# Altium PCB deserializer.PcbDoc (part 2 of 2)
Units mm, origin at the board's own origin, x right, y up, seen from the top; angles counter-clockwise.
Board outline 30 x 20 mm, 8 copper layers (Top Layer, L2 - GND, L3 - SIG, L4 - GND, L5 - PWR, L6 - SIG, L7 - GND, Bottom Layer), stack 1.6 mm thick; 98 components, 66 nets, 306 pads, 169 vias.
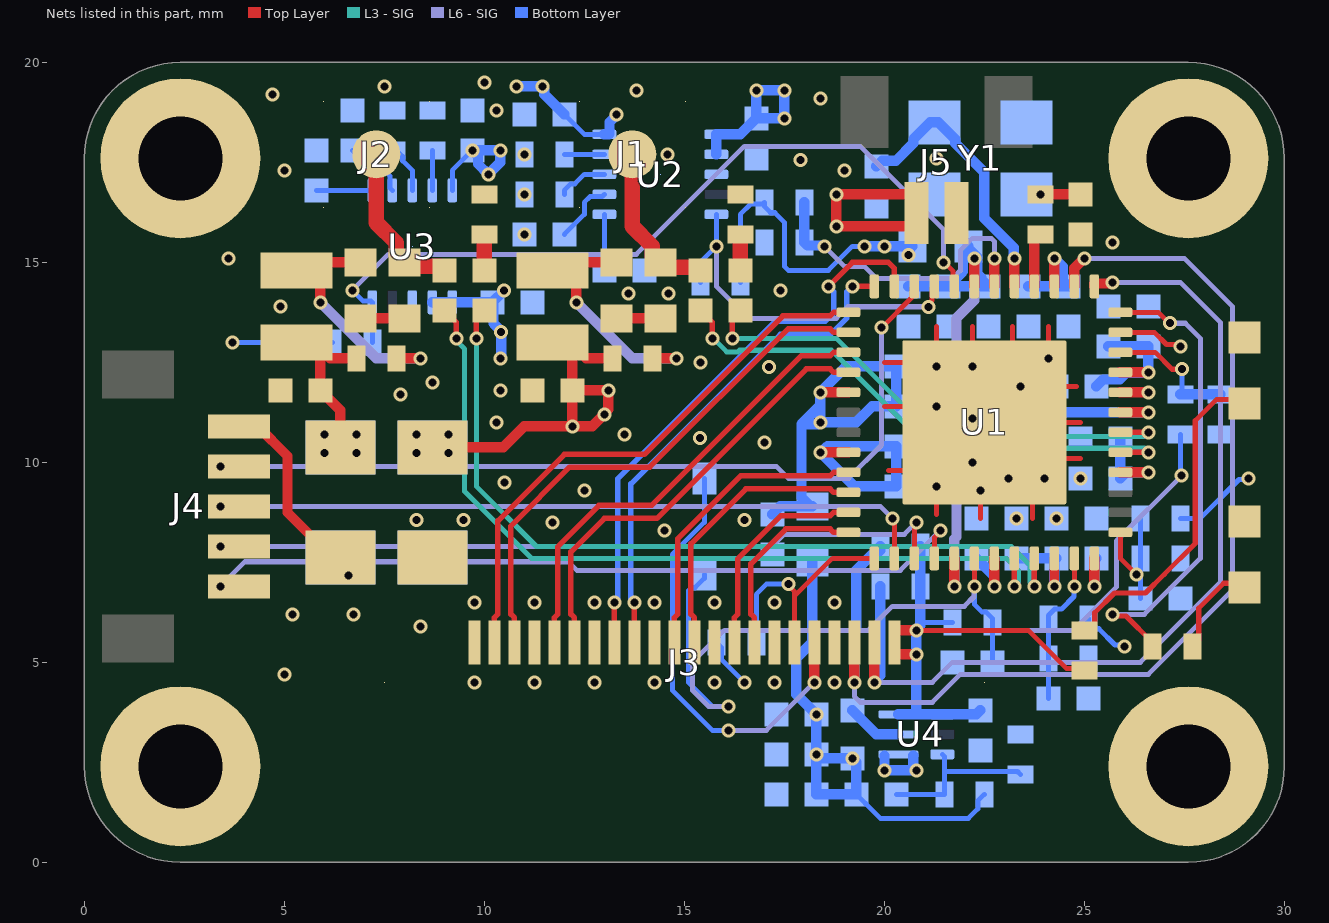
[diagram p8: the nets of this part, all layers, seen from the top]

## Part data (continued)
U2 U3: library part CMP-031-00018-1, "2.7-V to 40-V 152-mΩ 1.8-A eFuse with output power limiting 10-VSON -40 to 125", Case/Package="10-VSON (3x3)", Max Operating Temperature=125°C, Max Supply Voltage=40V, Min Operating Temperature=-40°C, Min Supply Voltage=2.7V, AECQ=No, Mounting Technology=SMT, MPN=TPS16412DRCR, Pins=10
U4: library part CMP-019-00068-1, "IC REG BUCK ADJ 1A 6VSON Buck Switching Regulator IC Positive Adjustable 0.6V 1 Output 1A 6-VFDFN", Case/Package="6-VSON-HR (1.5x1.5)", Frequency=2.2MHz, Max Operating Temperature=125°C, Max Supply Voltage=5.5V, Min Operating Temperature=-40°C, Min Supply Voltage=2.4V, Output Current=1A, Mounting Technology=SMD, Pins=6, RoHS Compliant=Yes
Y1: library part CMP-003-00030-1, "Crystal 25.000 Mhz 12PF SMD", Case/Package=3.2x2.5, Frequency=25MHz, Load Capacitance=12pF, Max Operating Temperature=125°C, Min Operating Temperature=-40°C, AECQ=Yes, ESR=50, Mounting Technology=SMD, Pins=4

## Free pads (board coordinates)
  round 4 hole 2.1: MH1(2.4,17.6) MH2(27.6,17.6) MH3(27.6,2.4) MH4(2.4,2.4)

## Via types
v1: diameter 0.35, hole 0.2, Top Layer to Bottom Layer, tented both sides, 169 vias

## Nets (pads, with @x,y where several pads share a name; then routed paths per layer and width w, separated by ;. In a path a pad name is that pad's centre, name@x,y a point inside that pad or via, vN(x,y) a via of type N, cw(c..) or ccw(c..) an arc to the next point about the centre after c; other vN are vias at no path point)
1V8: C53.2 C62.1 C63.2 C64.2 L6.2 L7.1 R7.2 R9.2 R15.2 | length 16.1
  Bottom Layer w0.127: C53.2@19.3,1.7 19.537,1.463 19.9,1.1 22.1,1.1 22.338,1.339 22.338,1.538 R15.2@22.5,1.7 ; R9.2@25.1,6.1 25.1,6 25.262,5.838 25.362,5.838 25.769,5.431 25.969,5.431 v1(26,5.4) ; R7.2@27.4,8.6 27.9,8.6 28.869,9.569 29.069,9.569 v1(29.1,9.6)
  Bottom Layer w0.254: L7.1@18.2,7.5 18.2,5.5 17.8,5.1 17.8,4.2 v1(18.3,3.7) v1(18.3,2.7) C63.2@18.3,1.7 C53.2@19.3,1.7 19.3,2.5 v1(19.2,2.6) C64.2@18.4,2.6
3V3: C61.1 J3.22 L8.1 R3.2 R4.2 R6.2 R19.1 R20.2 R22.2 R25.2 R26.2 R27.2 U4.1 U4.6 | length 35.4
  Top Layer w0.127: v1(20.8,5.8) 23.6,5.8 24.559,4.841 24.959,4.841 R19.1@25,4.8
  Top Layer w0.254: v1(20.8,5.2) 20.273,5.2 20.25,5.223 J3.22@20.25,5.5 20.25,5.777 20.273,5.8 v1(20.8,5.8)
  L6 - SIG w0.127: v1(20.8,5.8) 24.72,5.8 25.8,6.88 25.8,8.031 v1(27.434,9.666)
  Bottom Layer w0.127: v1(3.7,13) R26.2@6.2,13 ; R27.2@15.8,5.5 15.933,5.367 15.933,5.067 v1(16.5,4.5) ; R25.2@16.4,14.5 16.4,16.2 16.659,16.459 16.959,16.459 R22.2@17,16.5 17,16.4 17.161,16.238 17.261,16.238 17.5,16 17.5,14.9 17.6,14.8 18.6,14.8 19.2,15.4 v1(19.5,15.4) ; v1(20.6,15.188) 20.6,15.2 20.7,15.3 L8.1@20.7,15.4 ; v1(20.8,5.8) 21,6 R6.2@21.7,6 ; R20.2@27.4,10.7 27.4,9.7 v1(27.434,9.666)
  Bottom Layer w0.254: v1(19.5,15.4) v1(20,15.4) L8.1@20.7,15.4 ; U4.6@20.35,3.7 20.85,3.7 ; R3.2@20.9,7.9 R4.2@20.9,6.9 20.9,5.926 20.8,5.826 v1(20.8,5.8) v1(20.8,5.2) 20.8,3.75 20.85,3.7 ; C61.1@22.4,3.8 22.302,3.702 U4.1@21.45,3.7 U4.1@21.45,3.7 20.85,3.7
24V_VPOC: C37.2 C42.2 J5.1 U2.1 U2.2 U3.1 U3.2 | length 13.2
  Top Layer w0.254: v1(18.8,15.9) 20.627,15.9 20.8,16.073 20.8,16.527 20.627,16.7 v1(18.8,16.7) v1@18.8,16
  Bottom Layer w0.254: U3.2@8.7,14 U3.1@9.2,14 C42.2@10.2,14 ; v1(10.4,12.6) 10.4,12.626 10.423,12.649 v1(10.423,13.254) 10.423,13.277 10.232,13.468 10.232,13.968 C42.2@10.2,14 ; v1(10.494,14.294) C42.2@10.2,14 ; U2.2@15.8,17.7 U2.1@15.8,18.2 16.4,18.2 C37.2@16.8,18.6 ; C37.2@16.8,18.6 v1(16.8,19.3) v1(17.5,19.3) v1(17.5,18.6) C37.2@16.8,18.6
24V_VPOC0: C1.2 C2.2 C3.2 C23.2 L4.2 R1.2 U2.10 | length 13.6
  Top Layer w0.254: C2.2@8.7,10.375 10.475,10.375 11,10.9 v1(12.2,10.9) ; L4.2@11.7,13 L4.2@11.877,13 ; R1.2@13.2,12.6 12.55,12.6 12.15,13 L4.2@11.877,13 ; L4.2@11.877,13 12.2,12.677 C1.2@12.2,11.8 ; v1(12.2,10.9) 12.7,10.9 v1(13,11.2) 13,11.226 13.1,11.326 v1(13.1,11.8) C1.2@12.2,11.8 ; v1(12.2,10.9) C1.2@12.2,11.8
  Bottom Layer w0.127: C3.2@12,18.7 12.5,18.2 U2.10@13,18.2
  Bottom Layer w0.254: v1(10.8,19.4) v1(11.45,19.4) 11.45,19.374 11.5,19.324 11.5,19.2 C3.2@12,18.7 ; U2.10@13,18.2 13.121,18.2 13.128,18.207 13.128,18.503 13.3,18.675 v1(13.3,18.7)
  other v1: 8.3,10.239 9.1,10.239 8.3,10.7 9.1,10.7
24V_VPOC0_L1: L1.2 L2.1 | length 1.1
  Top Layer w0.254: L2.1@13.3,13.6 L1.2@14.4,13.6
24V_VPOC0_L2: L2.2 L4.1 R1.1 | length 5.8
  Top Layer w0.254: L4.1@11.7,14.8 11.9,15 L2.2@13.3,15 ; v1(12.3,14) L4.1@12.3,14.477 ; R1.1@14.2,12.6 v1(14.8,12.6)
  L6 - SIG w0.254: v1(12.3,14) 13.7,12.6 v1(14.8,12.6)
24V_VPOC1: C21.2 C22.2 C40.2 C41.2 L13.2 R5.2 U3.10 | length 10.6
  Top Layer w0.254: L13.2@5.3,13 L13.2@5.577,13 ; v1(6,10.239) v1(6.8,10.239) v1(6.8,10.7) C22.2@6.4,10.7 ; R5.2@6.8,12.6 6.15,12.6 5.75,13 L13.2@5.577,13 ; L13.2@5.577,13 5.9,12.677 C21.2@5.9,11.8 6.4,11.3 C22.2@6.4,10.7 ; C22.2@6.4,10.7 v1(6,10.7) 6.325,10.375 C22.2@6.4,10.375 C22.2@6.4,10.7
  Bottom Layer w0.127: U3.10@9.2,16.8 9.2,17.3 v1(9.7,17.8)
  Bottom Layer w0.254: v1(9.7,17.8) 9.844,17.656 9.844,17.456 v1(10.1,17.2) 10.4,17.5 v1(10.4,17.8) v1(9.7,17.8)
24V_VPOC1_L1: L10.2 L11.1 | length 1.1
  Top Layer w0.254: L11.1@6.9,13.6 L10.2@8,13.6
24V_VPOC1_L2: L11.2 L13.1 R5.1 | length 6.6
  Top Layer w0.254: v1(5.9,14) 5.9,14.477 5.577,14.8 L13.1@5.3,14.8 5.5,15 L11.2@6.9,15 ; R5.1@7.8,12.6 v1(8.4,12.6)
  L6 - SIG w0.254: v1(5.9,14) 7.3,12.6 v1(8.4,12.6)
BISTEN: R22.1 R23.2 U1.6 | length 8
  Top Layer w0.254: U1.6@22.75,14.4 v1(22.75,15.1)
  L6 - SIG w0.127: v1(18.5,15.4) 19,14.9 19.5,14.9 19.8,14.6 21.7,14.6 21.9,14.8 21.9,15.3 22.2,15.6 22.676,15.6 22.75,15.526 v1(22.75,15.1)
  Bottom Layer w0.254: R22.1@18,16.5 R23.2@18,15.5 18.082,15.418 18.482,15.418 v1(18.5,15.4)
BUCK1V8_FB: C53.1 R15.1 R16.2 U4.3 | length 4.1
  Bottom Layer w0.127: C53.1@20.3,1.7 R15.1@21.5,1.7 21.5,2.27 ; U4.3@21.45,2.7 21.5,2.65 21.5,2.27 ; R16.2@23.4,2.2 23.33,2.27 21.5,2.27
BUCK1V8_SW: L6.1 U4.5 | length 1.4
  Bottom Layer w0.254: L6.1@19.2,3.8 19.8,3.2 U4.5@20.35,3.2
EFUSE0_DVDT: C39.2 U2.7 | length 1.6
  Bottom Layer w0.127: C39.2@12,15.7 12.5,16.2 12.5,16.5 12.647,16.647 12.947,16.647 U2.7@13,16.7
EFUSE0_IDLY: C38.2 U2.6 | length 1.4
  Bottom Layer w0.127: C38.2@13,14.8 U2.6@13,16.2
EFUSE0_ILIM: R14.2 U2.8 | length 1.3
  Bottom Layer w0.127: R14.2@12,16.7 12,16.8 12.162,16.962 12.262,16.962 12.5,17.2 U2.8@13,17.2
EFUSE0_IOCP: R17.2 U2.9 | length 1
  Bottom Layer w0.127: R17.2@12,17.7 U2.9@13,17.7
EFUSE1_DVDT: C44.2 U3.7 | length 1.6
  Bottom Layer w0.127: C44.2@6.7,17.8 7.2,17.3 7.5,17.3 7.647,17.153 7.647,16.853 U3.7@7.7,16.8
EFUSE1_IDLY: C43.2 U3.6 | length 1.4
  Bottom Layer w0.127: C43.2@5.8,16.8 U3.6@7.2,16.8
EFUSE1_ILIM: R18.2 U3.8 | length 1.3
  Bottom Layer w0.127: R18.2@7.7,17.8 7.8,17.8 7.962,17.638 7.962,17.538 8.2,17.3 U3.8@8.2,16.8
EFUSE1_IOCP: R24.2 U3.9 | length 1
  Bottom Layer w0.127: U3.9@8.7,16.8 R24.2@8.7,17.8
EN_POC0: R25.1 U1.9 U2.5 | length 9.2
  Top Layer w0.127: v1(21.1,13.889) 21.1,13.949 21.194,14.043 21.194,14.344 U1.9@21.25,14.4
  L6 - SIG w0.127: v1(15.8,15.4) 15.8,14.4 16.6,13.6 18.8,13.6 19.089,13.889 v1(21.1,13.889)
  Bottom Layer w0.127: R25.1@15.4,14.5 15.4,15 v1(15.8,15.4) U2.5@15.8,16.2
EN_POC1: R26.1 U1.8 U3.5 | length 20.3
  Top Layer w0.127: v1(21.475,15) 21.5,15 21.722,14.778 21.722,14.428 U1.8@21.75,14.4
  L6 - SIG w0.127: v1(6.7,14.3) 7.6,15.2 13.8,15.2 16.5,17.9 19.4,17.9 21.475,15.825 v1(21.475,15)
  Bottom Layer w0.127: v1(6.7,14.3) 6.964,14.036 7.164,14.036 U3.5@7.2,14 R26.1@7.2,13
FPD0.DATA_N: C5.1 U1.42 | length 12.9
  Top Layer w0.137: v1(16.2,13.1) 16.2,13.6 C5.1@16.4,13.8 ; U1.42@25.9,10.75 v1(26.6,10.75)
  L3 - SIG w0.128: v1(16.2,13.1) 18.8,13.1 21.251,10.649 26.499,10.649 v1(26.6,10.75)
FPD0.DATA_P: C4.1 U1.41 | length 13.6
  Top Layer w0.137: C4.1@15.4,13.8 15.7,13.5 v1(15.7,13.1) ; U1.41@25.9,10.25 v1(26.6,10.25)
  L3 - SIG w0.128: v1(15.7,13.1) 15.721,13.1 16.06,12.761 16.34,12.761 16.382,12.802 18.677,12.802 21.128,10.351 26.499,10.351 v1(26.6,10.25)
FPD0_DATA: C4.2 J1.1 L1.1 | length 4.1
  Top Layer w0.389: J1.1@13.7,17.7 13.7,15.9 14.194,15.406 14.194,15.156 14.35,15 L1.1@14.4,15 14.519,14.881 15.319,14.881 C4.2@15.4,14.8
FPD0_DOUT_C_N: C5.2 R2.2 | length 0.9
  Top Layer w0.389: C5.2@16.4,14.8 R2.2@16.4,15.7
FPD1.DATA_N: C25.1 U1.33 | length 20.4
  Top Layer w0.137: v1(9.8,13.1) 9.8,13.6 C25.1@10,13.8 ; v1(23.75,6.9) U1.33@23.75,7.6
  L3 - SIG w0.128: v1(9.8,13.1) 9.8,9.4 11.302,7.898 23.174,7.898 23.649,7.423 23.649,7.001 v1(23.75,6.9)
FPD1.DATA_P: C24.1 U1.32 | length 20.5
  Top Layer w0.137: C24.1@9,13.8 9.3,13.5 v1(9.3,13.1) ; v1(23.25,6.9) U1.32@23.25,7.6
  L3 - SIG w0.128: v1(9.3,13.1) 9.3,13.04 9.502,12.837 9.502,9.277 11.179,7.6 23.051,7.6 23.351,7.3 23.351,7.001 v1(23.25,6.9)
FPD1_DATA: C24.2 J2.1 L10.1 | length 4.1
  Top Layer w0.389: J2.1@7.3,17.7 7.3,15.989 7.794,15.494 7.794,15.156 7.95,15 L10.1@8,15 8.1,14.9 8.9,14.9 C24.2@9,14.8
FPD1_DOUT_C_N: C25.2 R11.2 | length 0.9
  Top Layer w0.389: C25.2@10,14.8 R11.2@10,15.7
GND: C1.1 C2.1 C3.1 C6.1 C7.1 C8.1 C9.1 C10.1 C11.1 C12.1 C13.1 C14.1 C15.1 C16.1 C17.1 C18.1 C19.1 C20.1 C21.1 C22.1 C23.1 C26.1 C27.1 C28.1 C29.1 C30.1 C31.1 C32.1 C33.1 C34.1 C35.1 C36.1 C37.1 C38.1 C39.1 C40.1 C41.1 C42.1 C43.1 C44.1 C61.2 C62.2 C63.1 C64.1 D1.1 D2.1 J1.S1 J1.S2 J1.S3 J1.S4 J2.S1 J2.S2 J2.S3 J2.S4 J3.1 J3.4 J3.7 J3.10 J3.13 J3.16 J3.19 J3.SH1 J3.SH2 J4.5 J5.2 pad.MH1 pad.MH2 pad.MH3 pad.MH4 R2.1 R8.1 R10.1 R11.1 R14.1 R16.1 R17.1 R18.1 R21.1 R23.1 R24.1 U1.44 U1.49 U2.3 U2.11 U3.3 U3.11 U4.4 Y1.2 Y1.4 | length 31.5
  Top Layer w0.127: 20,11.4 v1(21.3,11.4) ; 20,12.5 U1.49@21.3,12.5 ; 20.1,9.8 22.5,9.8 U1.49@22.5,10.1 ; 21.3,8.7 v1(21.3,9.4) ; v1(21.3,12.4) U1.49@21.3,12.5 ; 21.3,13.4 U1.49@21.3,12.5 ; 22.2,13.4 U1.49@22.2,12.5 ; v1(22.204,12.4) 22.2,12.4 U1.49@22.2,12.5 ; 22.4,8.6 v1(22.4,9.3) ; 23.2,13.4 U1.49@23.2,11 ; v1(23.4,11.9) 24.8,11.9 ; 23.7,8.6 U1.49@23.7,10.1 ; v1(24.1,12.6) 24.1,13.4 ; 24.9,10.1 U1.49@23.7,10.1 ; 24.9,11 U1.49@23.7,11 ; U1.49@21.3,12.5 U1.49@22.2,12.5 ; U1.49@22.2,12.5 22.5,12.5 U1.49@22.5,11 ; U1.49@22.5,10.1 U1.49@23.7,10.1 ; U1.49@22.5,10.1 U1.49@22.5,11 ; U1.49@22.5,11 U1.49@23.2,11 ; U1.49@23.2,11 U1.49@23.7,11 ; U1.49@23.7,10.1 U1.49@23.7,11
  Top Layer w0.254: J4.5@3.862,10.9 4.337,10.9 5.081,10.156 5.081,8.744 6.6,7.225 v1(6.6,7.175) ; U1.44@25.9,11.75 v1(26.6,11.75)
  Bottom Layer w0.254: U4.4@20.002,2.673 20.002,2.302 v1(20,2.3) v1(20.8,2.3) 20.8,2.326 20.723,2.403 U4.4@20.723,2.673
  other v1: 9.75,4.5 11.25,4.5 12.75,4.5 14.25,4.5 15.75,4.5 17.25,4.5 18.75,4.5 5,4.7 8.4,5.9 5.2,6.2 6.731,6.2 9.75,6.5 11.25,6.5 12.75,6.5 14.25,6.5 15.75,6.5 17.25,6.5 18.75,6.5 14.5,8.3 11.7,8.5 8.3,8.562 9.475,8.562 16.5,8.562 23.3,8.6 24.3,8.6 12.5,9.3 10.5,9.5 23.1,9.6 24,9.6 24.9,9.6 22.204,10 17,10.5 15.386,10.614 13.5,10.7 10.3,11 22.204,11.1 7.9,11.7 10.4,11.8 8.7,12 17.121,12.379 15.4,12.5 4.9,13.9 13.6,14.225 14.6,14.225 17.4,14.3 3.6,15.1 25.7,15.5 11,15.7 11,16.7 5,17.3 19,17.3 17.9,17.561 21.3,17.6 11,17.7 14.575,17.7 10.3,18.8 18.4,19.1 4.7,19.2 13.8,19.3 7.5,19.4 10,19.5
GPIO0: J4.1 U1.28 | length 19.5
  Top Layer w0.127: U1.28@21.25,7.6 21.25,8.114 21.4,8.264 v1(21.4,8.3)
  L6 - SIG w0.127: v1(3.4,6.9) 4.013,7.513 12.1,7.513 12.313,7.3 20.4,7.3 v1(21.4,8.3)
GPIO1: J4.2 U1.27 | length 18.6
  Top Layer w0.127: U1.27@20.75,7.6 20.75,8.39 20.8,8.44 v1(20.8,8.5)
  L6 - SIG w0.127: v1(3.4,7.9) 17.2,7.9 17.5,8.2 20.5,8.2 v1(20.8,8.5)
GPIO2: J4.3 U1.26 | length 17.9
  Top Layer w0.127: v1(20.2,8.6) 20.2,8.54 20.25,8.49 U1.26@20.25,7.6
  L6 - SIG w0.127: v1(3.4,8.9) 19.9,8.9 v1(20.2,8.6)
GPIO4: J4.4 U1.10 | length 21.8
  Top Layer w0.127: v1(3.4,9.9) J4.4@3.862,9.9 ; v1(19.934,13.366) 20.694,14.125 20.694,14.344 U1.10@20.75,14.4
  L6 - SIG w0.127: v1(3.4,9.9) 17.3,9.9 17.6,9.6 19.1,9.6 19.934,10.434 v1(19.934,13.366)
I2C.SCL: J3.20 R3.1 U1.2 | length 27.9
  Top Layer w0.254: v1(19.25,4.5) J3.20@19.25,5.5 ; U1.2@24.75,14.4 24.75,14.85 v1(25,15.1)
  L6 - SIG w0.127: v1(19.25,4.5) 19.25,4.15 19.4,4 21.2,4 21.9,4.7 26.6,4.7 28.7,6.8 28.7,13.9 27.5,15.1 v1(25,15.1)
  Bottom Layer w0.254: v1(19.25,4.5) 19.25,5.85 19.3,5.9 19.3,7.3 19.702,7.702 19.802,7.702 19.9,7.8 R3.1@19.9,7.9
I2C.SDA: J3.21 R4.1 U1.1 | length 23.3
  Top Layer w0.254: v1(19.75,4.5) J3.21@19.75,5.5 ; U1.1@25.25,14.4 25.25,14.468 25.257,14.475 25.649,14.475 25.674,14.5 v1(25.7,14.5)
  L6 - SIG w0.127: v1(19.75,4.5) 21.2,4.5 21.7,5 26.4,5 28.4,7 28.4,13.5 27.4,14.5 v1(25.7,14.5)
  Bottom Layer w0.254: v1(19.75,4.5) 19.75,4.526 19.9,4.676 R4.1@19.9,6.9
IDX: C36.2 R9.1 R10.2 U1.35 | length 3.9
  Top Layer w0.127: v1(24.75,6.9) U1.35@24.75,7.6
  Bottom Layer w0.127: C36.2@24.1,4.1 R9.1@24.1,6.1 24.1,6.171 24.262,6.333 24.433,6.333 24.744,6.644 24.744,6.894 v1(24.75,6.9)
LED_3V3: D1.2 R19.2 | length 8.4
  Top Layer w0.127: R19.2@25,5.8 25.1,5.8 25.262,5.962 25.262,6.24 25.752,6.731 26.531,6.731 27,7.2 27.773,7.973 27.773,11.038 28.309,11.575 28.9,11.575 D1.2@29,11.475
LED_LOCK: D2.2 R13.2 | length 2.5
  Top Layer w0.127: R13.2@27.7,5.4 27.862,5.562 27.862,6.354 28.484,6.977 28.898,6.977 D2.2@29,6.875
LOCK: R13.1 U1.48 | length 11.9
  Top Layer w0.127: v1(25.7,6.2) 25.743,6.157 26.043,6.157 26.7,5.5 R13.1@26.7,5.4 ; U1.48@25.9,13.75 26.85,13.75 27.123,13.477 v1(27.146,13.477)
  L6 - SIG w0.127: v1(25.7,6.2) 26.5,6.2 27.9,7.6 27.9,13.1 27.523,13.477 v1(27.146,13.477)
MIPI.CLK_N: J3.8 U1.11 | length 14.4
  Top Layer w0.137: J3.8@13.25,5.5 v1(13.25,6.5) ; v1(18.6,14.4) 19.2,15 20.1,15 20.25,14.85 U1.11@20.25,14.4
  Bottom Layer w0.137: v1(13.25,6.5) 13.339,6.589 13.339,9.595 17.266,13.523 18.523,13.523 18.739,13.739 18.739,14.261 v1(18.6,14.4)
MIPI.CLK_P: J3.9 U1.12 | length 12.5
  Top Layer w0.137: J3.9@13.75,5.5 v1(13.75,6.5) ; v1(19.2,14.4) U1.12@19.75,14.4
  Bottom Layer w0.137: v1(13.75,6.5) 13.661,6.589 13.661,9.461 17.4,13.2 18.657,13.2 19.061,13.605 19.061,14.261 v1(19.2,14.4)
MIPI.D0_N: J3.2 U1.13 | length 14
  Top Layer w0.137: J3.2@10.25,5.5 10.25,6.118 10.339,6.207 10.339,8.539 12,10.2 14,10.2 17.461,13.661 18.643,13.661 18.732,13.75 U1.13@19.1,13.75
MIPI.D0_P: J3.3 U1.14 | length 13.5
  Top Layer w0.137: J3.3@10.75,5.5 10.75,6.118 10.661,6.207 10.661,8.405 12.134,9.877 14.134,9.877 17.595,13.339 18.643,13.339 18.732,13.25 U1.14@19.1,13.25
MIPI.D1_N: J3.5 U1.15 | length 11.7
  Top Layer w0.137: J3.5@11.75,5.5 11.75,6.118 11.839,6.207 11.839,7.895 12.866,8.923 14.181,8.923 17.919,12.661 18.643,12.661 18.732,12.75 U1.15@19.1,12.75
MIPI.D1_P: J3.6 U1.16 | length 11.2
  Top Layer w0.137: J3.6@12.25,5.5 12.25,6.118 12.161,6.207 12.161,7.761 13,8.6 14.314,8.6 18.053,12.339 18.643,12.339 18.732,12.25 U1.16@19.1,12.25
MIPI.D2_N: J3.11 U1.21 | length 7.6
  Top Layer w0.137: J3.11@14.75,5.5 14.75,6.118 14.839,6.207 14.839,8.095 16.405,9.661 18.643,9.661 18.732,9.75 U1.21@19.1,9.75
MIPI.D2_P: J3.12 U1.22 | length 7
  Top Layer w0.137: J3.12@15.25,5.5 15.25,6.118 15.161,6.207 15.161,7.961 16.539,9.339 18.643,9.339 18.732,9.25 U1.22@19.1,9.25
MIPI.D3_N: J3.14 U1.23 | length 5.4
  Top Layer w0.137: J3.14@16.25,5.5 16.25,6.118 16.339,6.207 16.339,7.595 17.405,8.661 18.643,8.661 18.732,8.75 U1.23@19.1,8.75
MIPI.D3_P: J3.15 U1.24 | length 4.8
  Top Layer w0.137: J3.15@16.75,5.5 16.75,6.118 16.661,6.207 16.661,7.461 17.539,8.339 18.643,8.339 18.732,8.25 U1.24@19.1,8.25
MODE: C35.2 R7.1 R8.2 U1.37 | length 3.2
  Top Layer w0.127: U1.37@25.9,8.25 25.9,7.6 v1(26.3,7.2)
  Bottom Layer w0.127: C35.2@26.4,6.6 R7.1@26.4,8.6
NetC8_2: C8.2 R12.1 Y1.3 | length 1
  Top Layer w0.254: v1(23.9,16.7) C8.2@24.9,16.7
PASS: U1.47 | length 1.6
  Top Layer w0.127: U1.47@25.9,13.25 26.75,13.25 27.057,12.943 27.357,12.943 v1(27.4,12.9)
PDB: C6.2 D3.2 R6.1 U1.30 | length 16.8
  Top Layer w0.127: v1(22.25,6.9) U1.30@22.25,7.6
  L6 - SIG w0.127: v1(16.1,3.9) 15.6,3.9 15.2,4.3 15.2,5 16,5.8 19.6,5.8 20.2,6.4 22,6.4 22.244,6.644 22.244,6.894 v1(22.25,6.9)
  Bottom Layer w0.127: D3.2@15.5,7.2 15.5,7.1 15.264,6.863 15.174,6.863 15.1,6.789 15.1,4.5 15.7,3.9 v1(16.1,3.9) ; v1(22.25,6.9) 22.25,6.45 22.438,6.262 22.538,6.262 22.7,6.1 R6.1@22.7,6 C6.2@22.7,5
RPI_IO0: J3.17 R27.1 U1.25 | length 6
  Top Layer w0.127: v1(17.6,6.961) 17.6,6.926 17.75,6.776 17.75,6.65 ; J3.17@17.75,5.5 17.75,6.65 ; U1.25@19.75,7.6 18.7,7.6 17.75,6.65
  Bottom Layer w0.127: R27.1@16.8,5.5 16.8,6.7 17.062,6.961 v1(17.6,6.961)
RPI_IO1_PDB: D3.1 J3.18 | length 11.1
  Top Layer w0.254: v1(18.25,4.5) J3.18@18.25,5.5
  L6 - SIG w0.127: v1(16.1,3.3) 17.05,3.3 v1(18.25,4.5)
  Bottom Layer w0.127: D3.1@15.5,9.6 15.5,8.5 14.7,7.7 14.7,4.3 15.7,3.3 v1(16.1,3.3)
VDD11_CSI: C27.2 C28.2 U1.20 | length 5.9
  Top Layer w0.254: v1(18.4,10.25) U1.20@19.1,10.25
  Bottom Layer w0.254: v1(18.4,10.25) 19.25,9.4 C28.2@20.3,9.4 C27.2@20.3,10.4 18.576,10.4 18.426,10.25 v1(18.4,10.25)
VDD11_D: C33.2 C34.2 U1.3 | length 2.5
  Top Layer w0.254: U1.3@24.25,14.4 v1(24.25,15.1)
  Bottom Layer w0.254: C34.2@23.6,14.4 C33.2@24.6,14.4 24.46,14.54 24.46,14.89 v1(24.25,15.1)
VDD11_FPD0: C29.2 C30.2 U1.43 | length 4.6
  Top Layer w0.254: U1.43@25.9,11.25 v1(26.6,11.25)
  Bottom Layer w0.254: C30.2@23.1,10.6 C29.2@24,10.6 24.165,10.765 24.165,11.065 24.35,11.25 v1(26.6,11.25)
VDD11_FPD1: C31.2 C32.2 U1.34 | length 2.4
  Top Layer w0.243: v1(24.25,6.9) U1.34@24.25,7.6
  Bottom Layer w0.254: C32.2@23.3,7.6 C31.2@24.3,7.6 24.25,7.55 v1(24.25,6.9)
VDD18: C9.2 C10.2 C11.2 C12.2 C13.2 C14.2 C15.2 C16.2 C17.2 C18.2 L7.2 U1.17 U1.31 U1.36 U1.40 U1.45 | length 20.3
  Top Layer w0.254: v1(18.4,11.75) U1.17@19.1,11.75 ; v1(22.75,6.9) U1.31@22.75,7.6 ; v1(25.25,6.9) U1.36@25.25,7.6 ; U1.40@25.9,9.75 v1(26.6,9.75) ; U1.45@25.9,12.25 v1(26.6,12.25)
  Bottom Layer w0.254: C15.2@17.2,8.7 17.4,8.9 L7.2@18.15,8.9 ; L7.2@18.2,8.9 L7.2@18.15,8.9 ; v1@18.408,11.75 v1(18.4,11.75) ; C18.2@22.3,7.6 22.738,7.162 22.738,6.912 v1(22.75,6.9) ; v1(25.25,6.9) 25.25,7.55 C12.2@25.3,7.6 ; C9.2@25.3,11.9 25.473,12.073 25.889,12.073 26.048,12.232 26.582,12.232 v1(26.6,12.25) C10.2@26.6,12.9 C11.2@25.6,12.9 ; C16.2@25.9,10.6 C17.2@25.9,9.6 26.05,9.75 v1(26.6,9.75) ; 17.927,10.95 18.4,11.423 ; 17.927,10.95 18.324,10.95 18.374,11 v1(18.4,11) ; 17.927,10.95 17.927,9.123 L7.2@18.15,8.9 ; v1(18.4,11) 19.3,11 19.7,11.4 C14.2@20.3,11.4 C13.2@20.3,12.4 19.05,12.4 v1(18.4,11.75) ; v1(18.4,11) 18.4,11.423 ; 18.4,11.423 v1(18.4,11.75)
VDD_SEL: R20.1 R21.2 U1.46 | length 3.4
  Top Layer w0.127: U1.46@25.9,12.75 26.771,12.75 27.194,12.327 v1(27.442,12.327)
  Bottom Layer w0.127: R20.1@27.4,11.7 27.442,11.742 v1(27.442,12.327)
  Bottom Layer w0.254: R20.1@27.4,11.7 R21.2@28.4,11.7
VDDIO_L: C19.2 C20.2 C26.2 L8.2 U1.7 U1.29 | length 14.2
  Top Layer w0.254: v1(21.75,6.9) U1.29@21.75,7.6 ; U1.7@22.25,14.4 v1(22.25,15.1)
  L6 - SIG w0.254: v1(21.75,6.9) 21.75,8.081 21.802,8.133 21.802,13.602 22.25,14.05 v1(22.25,15.1)
  Bottom Layer w0.254: C19.2@20.6,14.4 C26.2@21.6,14.4 ; L8.2@22.1,15.35 L8.2@22.323,15.127 ; L8.2@22.1,15.4 21.968,15.268 21.968,14.768 C26.2@21.6,14.4 ; L8.2@22.294,15.118 22.268,15.092 22.268,15.056 22.323,15.001 22.323,14.722 22.427,14.618 22.427,14.573 C20.2@22.6,14.4 C26.2@21.6,14.4
XIN: C7.2 U1.5 Y1.1 | length 7
  Top Layer w0.254: U1.5@23.25,14.4 v1(23.25,15.1)
  Bottom Layer w0.254: C7.2@19.8,17.4 19.94,17.54 20.29,17.54 20.727,17.977 20.727,18.077 21.15,18.5 Y1.1@21.25,18.5 21.35,18.5 21.773,18.077 21.773,17.977 22.5,17.25 22.5,16.1 23.236,15.364 23.236,15.114 v1(23.25,15.1)
XOUT: R12.2 U1.4 | length 1.4
  Top Layer w0.254: U1.4@23.75,14.4 23.75,15.602 23.848,15.7 R12.2@23.9,15.7
pads on no net: J4.M J5.M U1.18 U1.19 U1.38 U1.39 U2.4 U3.4 U4.2

## Polygon pours and split planes (outlines as drawn)
3V3 on L5 - PWR "NONET_L-01_P-001" (solid, pour order 27): 0,20 0,0 30,0 30,20
24V_VPOC on L5 - PWR "NONET_L-01_P-001" (solid, pour order 24): 9.8,9.7 9.8,20 19.2,20 19.2,15.2 13.7,9.7
24V_VPOC0 on L5 - PWR "NONET_L-01_P-001" (solid, pour order 19): 7.3,9.7 7.3,13.9 10.9,17.5 10.9,18 10.2,18.7 10.2,20 12.5,20 12.5,17.3 9.7,14.5 9.7,9.7
24V_VPOC1 on L5 - PWR "NONET_L-01_P-001" (solid, pour order 23): 5,9.7 5,20 10.8,20 10.8,17.5 7.2,13.9 7.2,9.7
1V8 on L5 - PWR "NONET_L-01_P-001" (solid, pour order 26): 17.7,4 17.7,0 30,0 30,10.3 26.9,10.3 21.3,10.3 21.3,4
VDD18 on L5 - PWR "NONET_L-01_P-001" (solid, pour order 25): 17.9,11.8 17.9,9 20.9,6 25.3,6 27.9,8.6 27.9,13.3 27.3,13.9 20,13.9
GND on L7 - GND "NONET_L-01_P-001" (solid, pour order 22): 0,20 0,0 30,0 30,20
GND on L6 - SIG "NONET_L-01_P-001" (solid, pour order 21): 0,20 0,0 30,0 30,20
GND on L4 - GND "NONET_L-01_P-001" (solid, pour order 20): 0,20 0,0 30,0 30,20
GND on Top Layer "NONET_L-01_P-001" (solid, pour order 18): 0,20 0,0 30,0 30,20
GND on Bottom Layer "NONET_L-01_P-001" (solid, pour order 16): 0,20 0,0 30,0 30,20
GND on L3 - SIG "NONET_L-01_P-001" (solid, pour order 11): 0,20 0,0 30,0 30,20
GND on L2 - GND "NONET_L-01_P-001" (solid, pour order 0): 0,20 0,0 30,0 30,20

## Other copper
Top Layer:
  region net GND: 23.55,3.75 22.75,3.75 22.75,3.4 21.45,3.4 21.45,5.35 23.55,5.35
  region net GND: 15.675,18.38 14.755,18.38 14.742,18.4 14.732,18.414 14.722,18.429 14.712,18.443 14.702,18.457 14.691,18.47 14.68,18.484 14.669,18.498 14.658,18.511 14.647,18.524 14.635,18.537 14.624,18.55 14.612,18.563 14.6,18.575 14.588,18.588 14.575,18.6 14.563,18.612 14.55,18.624 14.537,18.635 14.524,18.647 14.511,18.658 14.498,18.669 14.484,18.68 14.47,18.691 14.457,18.702 14.443,18.712 14.429,18.722 14.414,18.732 14.4,18.742 14.38,18.755 14.38,19.675 15.675,19.675
  region net GND: 13.02,18.755 13,18.742 12.986,18.732 12.971,18.722 12.957,18.712 12.943,18.702 12.93,18.691 12.916,18.68 12.902,18.669 12.889,18.658 12.876,18.647 12.863,18.635 12.85,18.624 12.837,18.612 12.825,18.6 12.812,18.588 12.8,18.575 12.788,18.563 12.776,18.55 12.765,18.537 12.753,18.524 12.742,18.511 12.731,18.498 12.72,18.484 12.709,18.47 12.698,18.457 12.688,18.443 12.678,18.429 12.668,18.414 12.658,18.4 12.645,18.38 11.725,18.38 11.725,19.675 13.02,19.675
  region net GND: 12.658,17 12.668,16.986 12.678,16.971 12.688,16.957 12.698,16.943 12.709,16.93 12.72,16.916 12.731,16.902 12.742,16.889 12.753,16.876 12.765,16.863 12.776,16.85 12.788,16.837 12.8,16.825 12.812,16.812 12.825,16.8 12.837,16.788 12.85,16.776 12.863,16.765 12.876,16.753 12.889,16.742 12.902,16.731 12.916,16.72 12.93,16.709 12.943,16.698 12.957,16.688 12.971,16.678 12.986,16.668 13,16.658 13.02,16.645 13.02,15.725 11.725,15.725 11.725,17.02 12.645,17.02
  region net GND: 15.675,15.725 14.38,15.725 14.38,16.645 14.4,16.658 14.414,16.668 14.429,16.678 14.443,16.688 14.457,16.698 14.47,16.709 14.484,16.72 14.498,16.731 14.511,16.742 14.524,16.753 14.537,16.765 14.55,16.776 14.563,16.788 14.575,16.8 14.588,16.812 14.6,16.825 14.612,16.837 14.624,16.85 14.635,16.863 14.647,16.876 14.658,16.889 14.669,16.902 14.68,16.916 14.691,16.93 14.702,16.943 14.712,16.957 14.722,16.971 14.732,16.986 14.742,17 14.755,17.02 15.675,17.02
  region net GND: 9.275,18.38 8.355,18.38 8.342,18.4 8.332,18.414 8.322,18.429 8.312,18.443 8.302,18.457 8.291,18.47 8.28,18.484 8.269,18.498 8.258,18.511 8.247,18.524 8.235,18.537 8.224,18.55 8.212,18.563 8.2,18.575 8.188,18.588 8.175,18.6 8.163,18.612 8.15,18.624 8.137,18.635 8.124,18.647 8.111,18.658 8.098,18.669 8.084,18.68 8.07,18.691 8.057,18.702 8.043,18.712 8.029,18.722 8.014,18.732 8,18.742 7.98,18.755 7.98,19.675 9.275,19.675
  region net GND: 9.275,15.725 7.98,15.725 7.98,16.645 8,16.658 8.014,16.668 8.029,16.678 8.043,16.688 8.057,16.698 8.07,16.709 8.084,16.72 8.098,16.731 8.111,16.742 8.124,16.753 8.137,16.765 8.15,16.776 8.163,16.788 8.175,16.8 8.188,16.812 8.2,16.825 8.212,16.837 8.224,16.85 8.235,16.863 8.247,16.876 8.258,16.889 8.269,16.902 8.28,16.916 8.291,16.93 8.302,16.943 8.312,16.957 8.322,16.971 8.332,16.986 8.342,17 8.355,17.02 9.275,17.02
  region net GND: 6.62,18.755 6.6,18.742 6.586,18.732 6.571,18.722 6.557,18.712 6.543,18.702 6.53,18.691 6.516,18.68 6.502,18.669 6.489,18.658 6.476,18.647 6.463,18.635 6.45,18.624 6.437,18.612 6.425,18.6 6.412,18.588 6.4,18.575 6.388,18.563 6.376,18.55 6.365,18.537 6.353,18.524 6.342,18.511 6.331,18.498 6.32,18.484 6.309,18.47 6.298,18.457 6.288,18.443 6.278,18.429 6.268,18.414 6.258,18.4 6.245,18.38 5.325,18.38 5.325,19.675 6.62,19.675
  region net GND: 6.258,17 6.268,16.986 6.278,16.971 6.288,16.957 6.298,16.943 6.309,16.93 6.32,16.916 6.331,16.902 6.342,16.889 6.353,16.876 6.365,16.863 6.376,16.85 6.388,16.837 6.4,16.825 6.412,16.812 6.425,16.8 6.437,16.788 6.45,16.776 6.463,16.765 6.476,16.753 6.489,16.742 6.502,16.731 6.516,16.72 6.53,16.709 6.543,16.698 6.557,16.688 6.571,16.678 6.586,16.668 6.6,16.658 6.62,16.645 6.62,15.725 5.325,15.725 5.325,17.02 6.245,17.02
  region net GND: 8.55,3.4 7.25,3.4 7.25,3.75 6.45,3.75 6.45,5.35 8.55,5.35
Bottom Layer:
  region net GND: 14.725,15.5 14.575,15.5 cw(c14.575,15.55) 14.525,15.55 14.525,16 14.275,16 14.275,15.55 cw(c14.225,15.55) 14.225,15.5 14.075,15.5 cw(c14.075,15.55) 14.025,15.55 14.025,16 13.625,16 cw(c13.625,16.05) 13.575,16.05 13.575,18.35 cw(c13.625,18.35) 13.625,18.4 14.025,18.4 14.025,18.85 cw(c14.075,18.85) 14.075,18.9 14.225,18.9 cw(c14.225,18.85) 14.275,18.85 14.275,18.4 14.525,18.4 14.525,18.85 cw(c14.575,18.85) 14.575,18.9 14.725,18.9 cw(c14.725,18.85) 14.775,18.85 14.775,18.4 15.18,18.4 cw(c15.18,18.355) 15.225,18.355 15.225,16.05 cw(c15.175,16.05) 15.175,16 14.775,16 14.775,15.55 cw(c14.725,15.55)
  region net GND: 6.5,15.075 6.5,15.225 cw(c6.55,15.225) 6.55,15.275 7,15.275 7,15.525 6.55,15.525 cw(c6.55,15.575) 6.5,15.575 6.5,15.725 cw(c6.55,15.725) 6.55,15.775 7,15.775 7,16.175 cw(c7.05,16.175) 7.05,16.225 9.35,16.225 cw(c9.35,16.175) 9.4,16.175 9.4,15.775 9.85,15.775 cw(c9.85,15.725) 9.9,15.725 9.9,15.575 cw(c9.85,15.575) 9.85,15.525 9.4,15.525 9.4,15.275 9.85,15.275 cw(c9.85,15.225) 9.9,15.225 9.9,15.075 cw(c9.85,15.075) 9.85,15.025 9.4,15.025 9.4,14.62 cw(c9.355,14.62) 9.355,14.575 7.05,14.575 cw(c7.05,14.625) 7,14.625 7,15.025 6.55,15.025 cw(c6.55,15.075)

## Silkscreen, mask and mechanical layers (free items; w line width, h text height)
Top Overlay:
  text "PWR" at 28.08,11.367 h0.7 r90
  text "LOCK" at 28.08,6.417 h0.7 r90
Board Shape:
  the board outline again, w0.2

## Dimensions
27.6,0 to 27.6,20 on Notes (Mech3)
0,17.6 to 30,17.6 on Notes (Mech3)